# Altium PCB Copy of PCB1.PcbDoc
Units mm, origin at the board's own origin, x right, y up, seen from the top; angles counter-clockwise.
Board outline 152.4 x 101.6 mm, 2 copper layers (Top Layer, Bottom Layer); 27 components, 31 nets, 125 pads, 0 vias.
Unrouted connection lines stored in the file: 45.
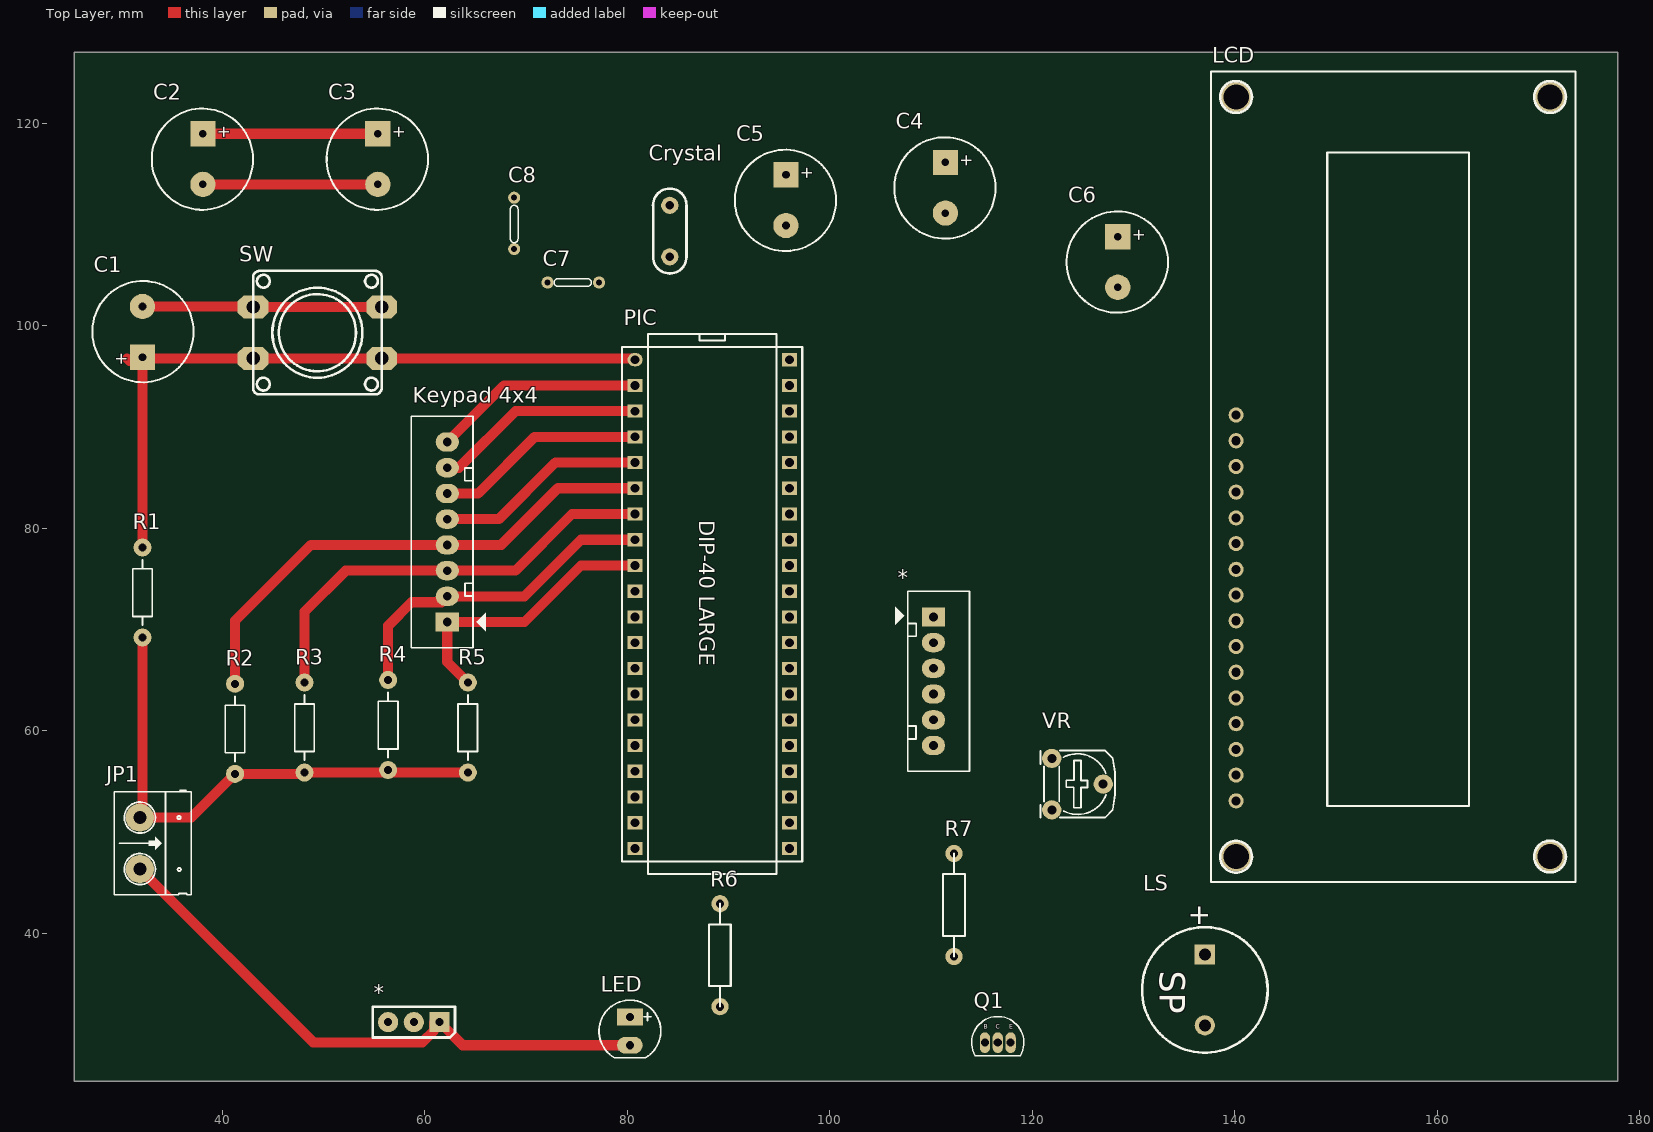
[diagram p0: Top Layer view]
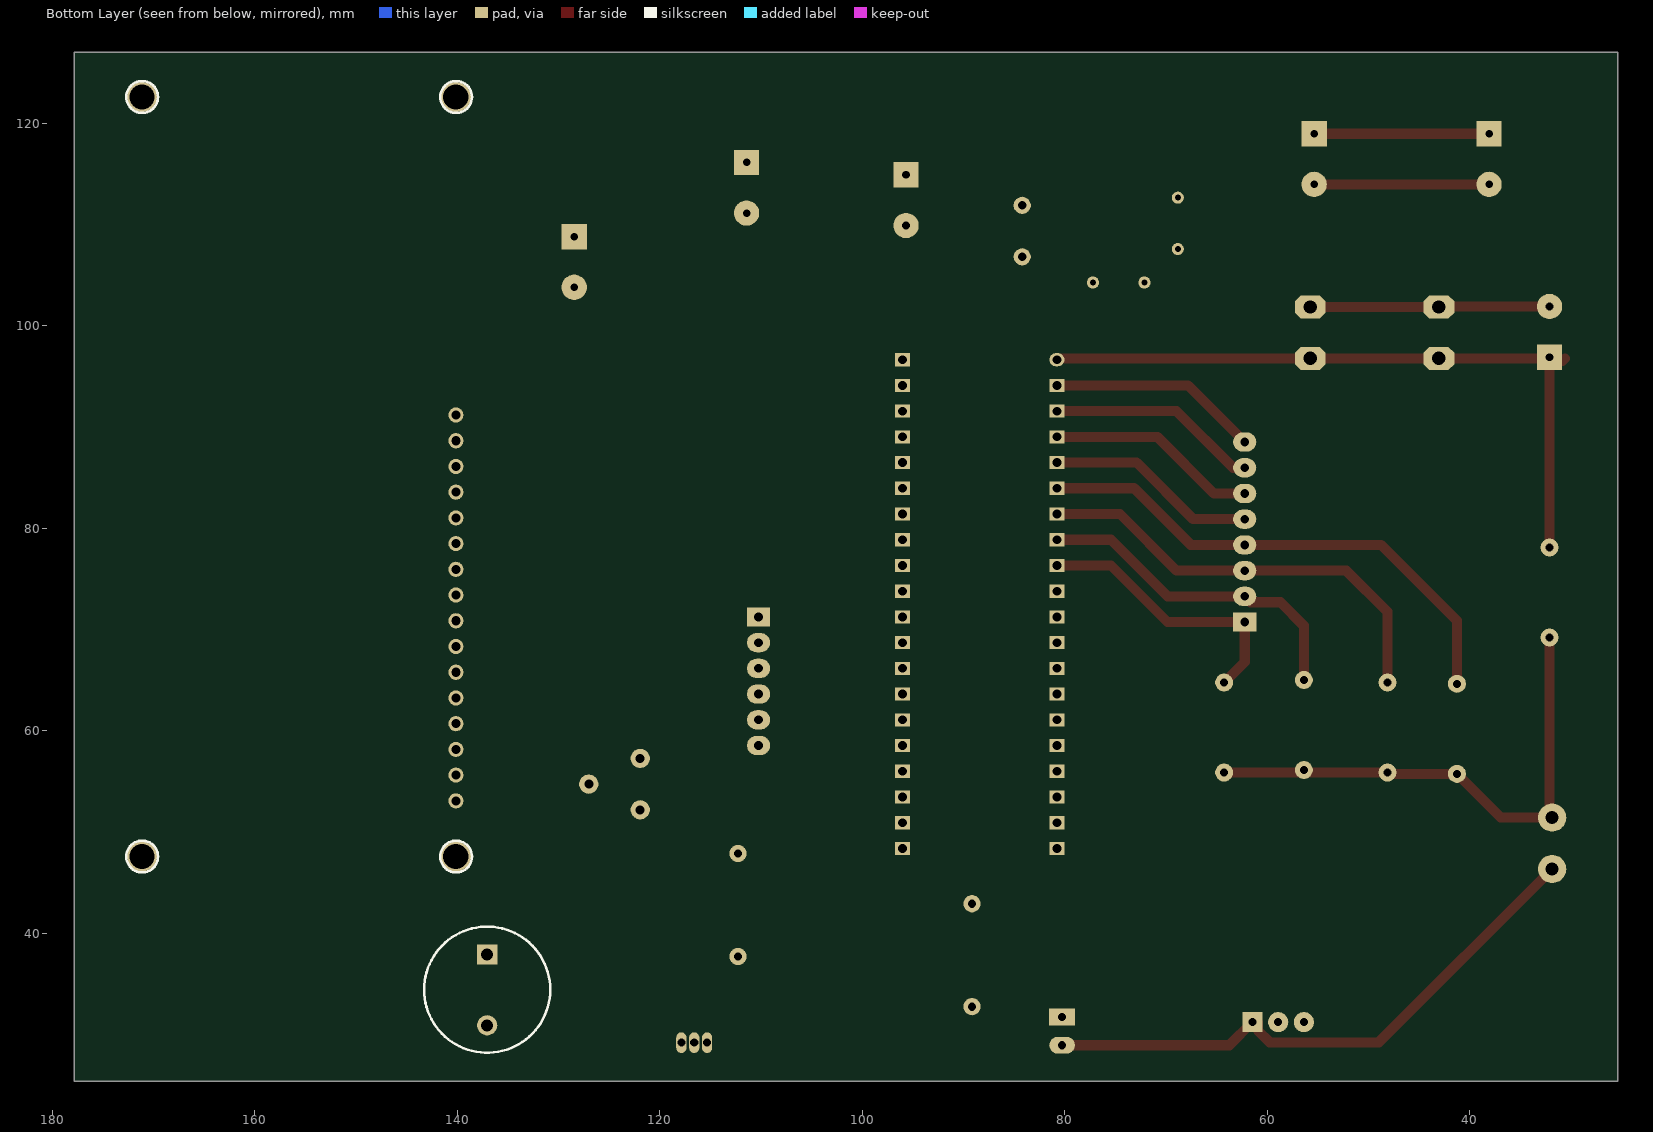
[diagram p1: Bottom Layer view, seen from below]

## Layer stack, top to bottom
Top Solder: solder mask 0.0102, Solder Resist, Dk 3.5
Top Layer: signal copper 0.0356
Dielectric 1: dielectric 0.32, FR-4, Dk 4.8
Bottom Layer: signal copper 0.0356
Bottom Solder: solder mask 0.0102, Solder Resist, Dk 3.5

## Board outline
25.4,25.4 177.8,25.4 177.8,127 25.4,127

## Design rules (kind name [scope] priority, off if disabled: settings)
Clearance [All] p1: gap=0.5 ignorepadtopadclearanceinfootprint=FALSE
PolygonConnect [All] p1: connectstyle=Relief reliefconductorwidth=0.5 reliefentries=4 polygonreliefangle="90 Angle" airgapwidth=0.5
RoomDefinition Sheet1 [InComponentClass('Sheet1')] p1: confinementstyle=ConfineIn formatcopy=TRUE lockcomponents=FALSE outline 6.858,24.257 274.32,24.257 274.32,127.127 6.858,127.127
RoutingVias [All] p1: holewidth=0.711 width=1.27 viastyle="Through Hole" minholewidth=0.711 minwidth=1.27 maxholewidth=0.711 maxwidth=1.27
SolderMaskExpansion [All] p1: expansion=0.102
Width [All] p1: maxlimit=3 minlimit=0.5 preferedwidth=1
30 further rules are at their usual default settings.

## Components (designator, comment, footprint, x,y, rotation, side; value= is the part's Value field where it differs from the comment)
* "Module Sim800a mini" CON6 110.236,71.247 r270 top
* "Servo" CON3-2 62.992,29.718 r180 top
C1 "1000uF" "Cap 10mm" 32.131,99.401 r270 top value=10uF/50V
C2 "1000uF" "Cap 10mm" 38.1,116.459 r90 top value=10uF/50V
C3 "1000uF" "Cap 10mm" 55.372,116.459 r90 top value=10uF/50V
C4 "1000uF" "Cap 10mm" 111.419,113.625 r90 top value=10uF/50V
C5 "1000uF" "Cap 10mm" 95.671,112.395 r90 top value=10uF/50V
C6 "1000uF" "Cap 10mm" 128.437,106.299 r90 top value=10uF/50V
C7 "Capacitor Ceramic" Tu-ceramic 72.136,104.267 r0 top value=33p
C8 "Capacitor Ceramic" Tu-ceramic 68.834,107.569 r90 top value=33p
Crystal "20MHz" XTAL 84.201,109.347 r0 top
JP1 "Header 2_1" HED2 31.877,51.435 r270 top value="Header 2"
"Keypad 4x4" "Component_1" CON8 62.23,70.739 r90 top
LCD "LCD 16x2A" LCD16X2 140.121,53.086 r90 top value=LCD16x2A
LED "LED" "LED-5mm BLUE" 80.264,30.353 r270 top
LS "SPEAKER" speaker 137.033,34.417 r270 top
PIC "PIC16F877A-E/P" DIP.100/40/W.600/L2.100 88.392,72.517 r270 top
Q1 "Transistor NPN" BCE 116.596,29.21 r0 top value=C828
R1 "10k" R1/4W 32.131,78.105 r270 top value="R1/4W - 1K"
R2 "10k" R1/4W 41.275,64.643 r270 top value="R1/4W - 1K"
R3 "10k" R1/4W 48.133,64.77 r270 top value="R1/4W - 1K"
R4 "10k" R1/4W 56.388,65.024 r270 top value="R1/4W - 1K"
R5 "10k" R1/4W 64.262,64.77 r270 top value="R1/4W - 1K"
R6 "RESISTOR" "Res 10mm (1/2W)" 89.154,37.846 r270 top value=1K
R7 "RESISTOR" "Res 10mm (1/2W)" 112.268,42.799 r90 top value=1K
SW "SW-2P-S" SW-BIG 55.753,101.854 r0 top
VR "10K" VR 121.92,57.277 r270 top value="VR 10K"

## Footprints (in the part's own frame and the unit in brackets; to place one, negate y for a bottom-side part, rotate by r counter-clockwise, add the part's x,y. Pads: shape width x height; smd on the part's side, far side on the other; paste and mask are expansions set on the pad)
BCE [mil] "Transistor BCE"
  oval 40x80 hole 31.49 unplated: 1(-0.39,0) 2(-50.39,0) 3(49.61,0)
  silkscreen extent -102,-50 101,101, body extent -90,-48 87,90, height 315
"Cap 10mm" [mm] "Cap d=10mm, pitch=5mm"
  rect 2.5x2.5 hole 0.75: 1(2.5,0)
  round 2.5 hole 0.75: 2(-2.5,0)
  silkscreen extent -5.01,-4.95 4.98,5.05, body extent -5.01,-5 5,5, height 16.31
CON3-2 [mm] "CON3 THANG"
  rect 2x2 hole 0.8: 1(1.524,-1.524)
  round 2 hole 0.8: 2(4.064,-1.524) 3(6.604,-1.524)
  silkscreen extent 0,-3.05 8.13,0, body extent 0.25,-2.79 7.87,-0.25, height 2.11
CON6 [mil] "CON6"
  rect 75x90 hole 34: 1(0,0)
  oval 75x90 hole 34: 2(100,0) 3(200,0) 4(300,0) 5(400,0) 6(500,0)
  silkscreen extent -100,-150 600,140
CON8 [mil] "CON8"
  rect 75x90 hole 34: 1(0,0)
  oval 75x90 hole 34: 2(100,0) 3(200,0) 4(300,0) 5(400,0) 6(500,0) 7(600,0) 8(700,0)
  silkscreen extent -100,-150 800,140
DIP.100/40/W.600/L2.100 [mil]
  oval 51.18x59.06 hole 34: 1(-950,-300)
  rect 51x59 / inner round 58 / far side rect 51x59 hole 34: 2(-850,-300) 3(-750,-300) 4(-650,-300) 5(-550,-300) 6(-450,-300) 7(-350,-300) 8(-250,-300) 9(-150,-300) 10(-50,-300) 11(50,-300) 12(150,-300) 13(250,-300) 14(350,-300) 15(450,-300) 16(550,-300) 17(650,-300) 18(750,-300) 19(850,-300) 20(950,-300) 21(950,300) 22(850,300) 23(750,300) 24(650,300) 25(550,300) 26(450,300) 27(350,300) 28(250,300) 29(150,300) 30(50,300) 31(-50,300) 32(-150,300) 33(-250,300) 34(-350,300) 35(-450,300) 36(-550,300) 37(-650,300) 38(-750,300) 39(-850,300) 40(-950,300)
  silkscreen extent -1050,-350 1050,350, body extent -1032,-305 1032,305, height 224
HED2 [mil] "Header 2, 2 pin, hight 300mil, Pin to Pin 200, Colour Green"
  round 110 hole 50: 1(0,0) 2(200,0)
  silkscreen extent -106,-100 300,200, body extent -92,-140 302,155, height 394
LCD16X2 [mm] "Character LCD 16x2"
  round 1.5 hole 0.9: 1(0,0) 2(2.54,0) 3(5.08,0) 4(7.62,0) 5(10.16,0) 6(12.7,0) 7(15.24,0) 8(17.78,0) 9(20.32,0) 10(22.86,0) 11(25.4,0) 12(27.94,0) 13(30.48,0) 14(33.02,0) 15(35.56,0) 16(38.1,0)
  round 3 hole 2.5 unplated: M1(-5.5,0) M2(69.5,0) M3(-5.5,-31) M4(69.5,-31)
  silkscreen extent -8,-33.5 72,2.5, body extent -8.01,-33.5 72,2.5, height 14.16
"LED-5mm BLUE" [mil] "LED-5mm BLUE"
  rect 65x100 hole 32: 1(-55,0)
  oval 65x100 hole 32: 2(55,0)
  silkscreen extent -120,-120 104,120, body extent -113,-120 100,117, height 339
R1/4W [mil] "R 1/4W, 2 Pin, 350mil"
  round 70 hole 31: 1(0,0) 2(350,0)
  silkscreen extent 48,-38 302,38, body extent -40,-47 386,47, height 111
"Res 10mm (1/2W)" [mil] "Resistor; 2 Leads; 1/2W; Solder Pad 35mil"
  round 67 hole 32: 1(-200,0) 2(200,0)
  silkscreen extent -200,-43 200,42, body extent -212,-46 212,45, height 96
speaker [mm] "Speaker footprint"
  rect 2x2 hole 1.2: 1(-3.5,0)
  round 2 hole 1.2: 2(3.5,0)
  silkscreen extent -6.2,-6.2 6.2,6.2, body extent -6.2,-6.2 6.2,6.2, height 10.02
SW-BIG [mil]
  oct 120x90 hole 52: 1(-500,0) 1(0,0) 2(-500,-200) 2(0,-200)
  silkscreen extent -500,-340 0,140, body extent -507,-338 5,134, height 288
Tu-ceramic [mm] "Tu gom mini"
  round 1.2 hole 0.6: 1(0,0) 2(5.08,0)
  silkscreen extent 0.64,-0.38 4.32,0.38, body extent -0.38,-0.85 5.46,0.85, height 6.12
VR [mil] "Resistor Variable"
  round 75 hole 35: 1(0,0) 2(100,200) 3(200,0)
  silkscreen extent -31,-44 231,246, body extent -87,-30 307,372, height 165
XTAL [mil] "Crystal, Thru-Hole; 2 Leads; Body 3.1 x 8.2 mm (Dia.xH); Solder pad 35mil"
  round 67 hole 32: 1(0,100) 2(0,-100)
  silkscreen extent -65,-165 65,165, body extent -92,-223 92,223, height 139

## Part data
C1 C2 C3 C4 C5 C6: library part CP1, "Cap P  0,1uF < 22uF , 16 - 50V", Description 1="10 => 220uF/6,3V/10V - 10uF => 100uF/16V", Description 2="0,1uF => 33uF/50V - 10uF => 22uF/63V", Description 3="0,47uF => 10uF/100V"
C7 C8: library part CapDecop, "Capacitor", LatestRevisionDate=17-Jul-2002, LatestRevisionNote="Re-released for DXP Platform.", PackageReference=RAD-0.3, Published=8-Jun-2000, Publisher="Altium Limited"
Crystal: library part XTAL, "Crystal Oscillator", LatestRevisionDate=17-Jul-2002, LatestRevisionNote="Re-released for DXP Platform.", PackageReference=R38, Published=8-Jun-2000, Publisher="Altium Limited"
JP1: "Header, 2-Pin", Manufacturer="Generic Components", Class=Connector
LCD: library part LCD16x2A, "LCD dipslay 16 char, 2 line"
PIC: "Enhanced FLASH Microcontroller, 8K (x14-Bit words) FLASH, 368 Bytes RAM, 40-Pin PDIP, Standard VDD Range, Extended Temperature", PackageDocument=2003, Code_JEDEC=MO-011, ComponentLink1Description="Manufacturer Link", ComponentLink1URL=http://www.microchip.com/index.asp, ComponentLink2Description=Datasheet, ComponentLink2URL=http://ww1.microchip.com/downloads/en/DeviceDoc/39582b.pdf, ComponentLink3Description="Packaging Specification", ComponentLink3URL=http://ww1.microchip.com/downloads/en/PackagingSpec/00049AD.pdf, DatasheetDocument=DS39582B_2003, LatestRevisionDate=4-Mar-2005, LatestRevisionNote="Stylized 3D Model Added.", Note="25mA sink/source per I/O.", PackageReference=PDIP600-40, Published=11-Oct-2004, Publisher="Altium Limited"
Q1: "Transistor NPN, doc chan tu bung"
R1 R2 R3 R4 R5: library part R, "Resistor 1/4W"
R6 R7: "Resistor", LatestRevisionDate=17-Jul-2002, LatestRevisionNote="Re-released for DXP Platform.", PackageReference=AXIAL-0.3, Published=8-Jun-2000, Publisher="Altium Limited"
SW: library part SW-2PIN-SMALL, "Switch Small 2 Pin", LatestRevisionDate=17-Jul-2002, LatestRevisionNote="Re-released for DXP Platform.", PackageReference=SPST-2, Published=24-Mar-1999, Publisher="Altium Limited"
VR: library part VR1, "Var Resistor"
LS: ComponentLink1Description="Digikey Part Link", ComponentLink2Description="Open Datasheet", ComponentLink2URL=H:\LIBRARY\LIBRARY.Datasheet\, Published=13-April-2009, Publisher="Hoang Nguyen", Vendor=Digikey

## Nets (pads, with @x,y where several pads share a name; then routed paths per layer and width w, separated by ;. In a path a pad name is that pad's centre, name@x,y a point inside that pad or via, vN(x,y) a via of type N, cw(c..) or ccw(c..) an arc to the next point about the centre after c; other vN are vias at no path point)
5V: *.3 C2.1 C3.1 C4.1 C5.1 C6.1 JP1.1 LCD.2 LCD.15 PIC.11 PIC.32 R1.2 R2.2 R3.2 R4.2 R5.2 R7.2 VR.3 | length 69.4
  Top Layer w1: R1.2 32.131,51.689 JP1.1 36.957,51.435 R2.2 48.006,55.753 R3.2 R5.2 ; C2.1 C3.1
A0: "Keypad 4x4.8" PIC.2 | length 20.9
  Top Layer w1: 62.23,88.519 67.818,94.107 PIC.2
A1: "Keypad 4x4.7" PIC.3 | length 20.9
  Top Layer w1: 62.23,85.979 63.373,85.979 68.961,91.567 PIC.3
A2: "Keypad 4x4.6" PIC.4 | length 20.9
  Top Layer w1: 62.23,83.439 65.278,83.439 70.866,89.027 PIC.4
A3: "Keypad 4x4.5" PIC.5 | length 20.9
  Top Layer w1: 62.23,80.899 67.31,80.899 72.898,86.487 PIC.5
A4: "Keypad 4x4.4" PIC.6 R2.1 | length 51.1
  Top Layer w1: R2.1 41.275,70.866 48.768,78.359 62.23,78.359 67.564,78.359 73.152,83.947 PIC.6
A5: "Keypad 4x4.3" PIC.7 R3.1 | length 43.6
  Top Layer w1: R3.1 48.133,71.755 52.197,75.819 62.23,75.819 68.961,75.819 74.549,81.407 PIC.7
B0: LCD.4 PIC.33
B1: LCD.5 PIC.34
B2: LCD.6 PIC.35
B4: LCD.11 PIC.37
B5: LCD.12 PIC.38
B6: LCD.13 PIC.39
B7: LCD.14 PIC.40
C1: *.2@58.928,31.242 PIC.15
E0: "Keypad 4x4.2" PIC.8 R4.1 | length 33.3
  Top Layer w1: R4.1 56.388,70.389 58.691,72.692 61.643,72.692 62.23,73.279 69.85,73.279 75.438,78.867 PIC.8
E1: "Keypad 4x4.1" PIC.9 R5.1 | length 27.7
  Top Layer w1: R5.1 62.23,66.802 62.23,70.739 69.85,70.739 75.438,76.327 PIC.9
GND: *.1 *.2@110.236,68.707 C1.2 C2.2 C3.2 C4.2 C5.2 C6.2 C7.1 C8.1 JP1.2 LCD.1 LCD.16 LED.2 PIC.12 PIC.31 Q1.3 SW.1 VR.1 | length 98.6
  Top Layer w1: JP1.2 48.99,29.242 59.756,29.242 60.928,30.414 60.928,31.242 61.468,31.242 63.754,28.956 LED.2 ; C1.2 43.006,101.901 43.053,101.854 SW.1@55.753,101.854 ; C2.2 C3.2
NetC8_2: C8.2 Crystal.1
NetLCD_3: LCD.3 VR.2
NetLED_1: LED.1 R6.2
NetLS_1: LS.1 R7.1
NetLS_2: LS.2 Q1.1
NetPIC_23: PIC.23 R6.1
NetPIC_24: PIC.24 Q1.2
OCS1: C7.2 Crystal.2
OSC1: PIC.13
OSC2: PIC.14
Rx: *.5 PIC.26
Tx: *.6 PIC.25
Vpp: C1.1 PIC.1 R1.1 SW.2 | length 67.9
  Top Layer w1: 30.607,96.774 30.861,96.52 ; R1.1 C1.1 32.258,96.774 43.053,96.774 55.753,96.774 80.645,96.774 PIC.1
pads on no net: *.4 LCD.7 LCD.8 LCD.9 LCD.10 LCD.M1 LCD.M2 LCD.M3 LCD.M4 PIC.10 PIC.16 PIC.17 PIC.18 PIC.19 PIC.20 PIC.21 PIC.22 PIC.27 PIC.28 PIC.29 PIC.30 PIC.36

## Text inside footprints (layer, text, board x,y; h text height)
C1: Top Overlay "+" at 29.131,97.401 h2 r270
C2: Top Overlay "+" at 41.1,118.459 h2 r90
C3: Top Overlay "+" at 58.372,118.459 h2 r90
C4: Top Overlay "+" at 114.419,115.625 h2 r90
C5: Top Overlay "+" at 98.671,114.395 h2 r90
C6: Top Overlay "+" at 131.437,108.299 h2 r90
LS: Top Overlay "SP" at 132.588,36.322 h2.54 r270; Top Overlay "+" at 135.636,42.926 h2.03 r270
PIC: Top Overlay "DIP-40 LARGE" at 87.122,80.772 h1.5 r270
Q1: Top Overlay "C" at 116.396,30.41 h0.76; Top Overlay "B" at 115.196,30.41 h0.76; Top Overlay "E" at 117.696,30.41 h0.76